# Altium PCB lilred_management_board.PcbDoc
Units mm, origin at the board's own origin, x right, y up, seen from the top; angles counter-clockwise.
Board outline 113.63 x 84.5 mm, 2 copper layers (Top Layer, Bottom Layer); 139 components, 89 nets, 405 pads, 106 vias.
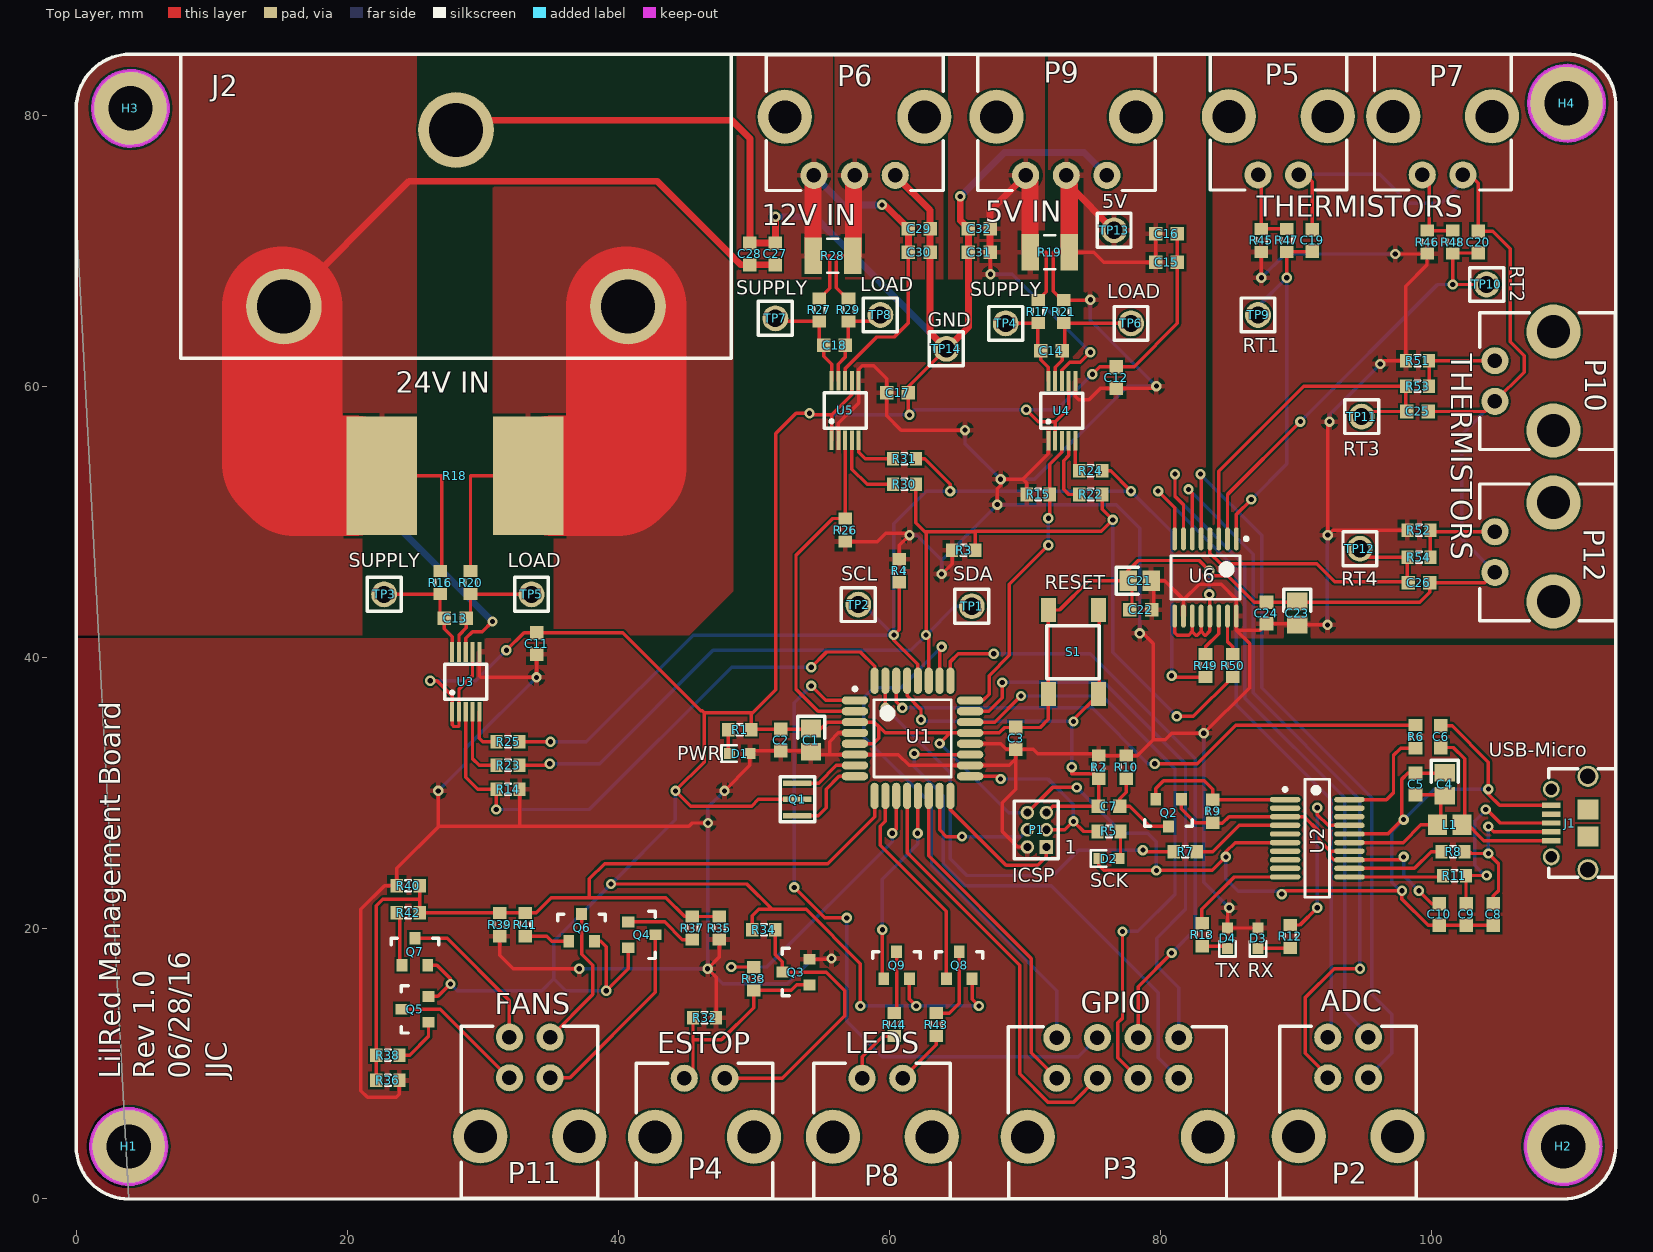
[diagram p0: Top Layer view]
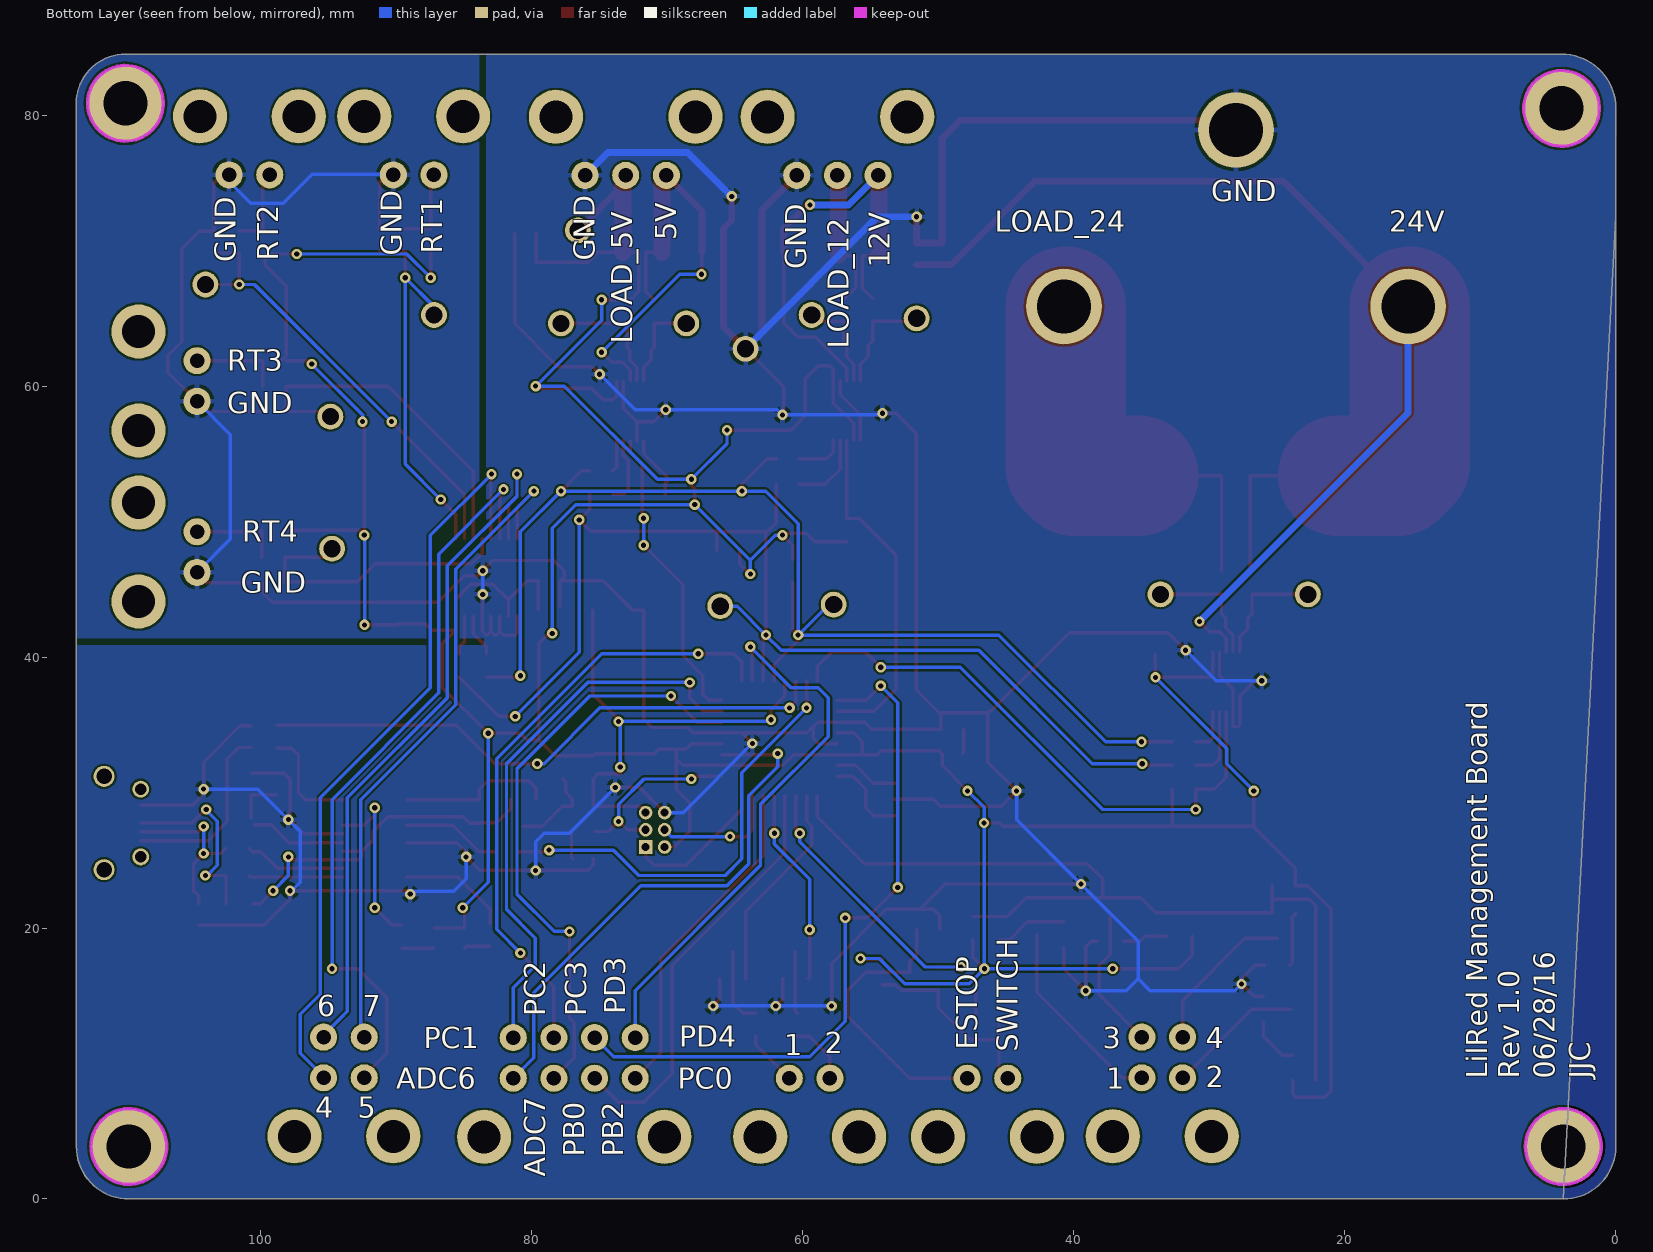
[diagram p1: Bottom Layer view, seen from below]

## Layer stack, top to bottom
Top Solder: solder mask 0.0102, Solder Resist, Dk 3.5
Top Layer: signal copper 0.0356
Dielectric1: dielectric 0.32, FR-4, Dk 4.8
Bottom Layer: signal copper 0.0356
Bottom Solder: solder mask 0.0102, Solder Resist, Dk 3.5

## Board outline
0,72.5 0,80.5 cw(c4,80.5) 4,84.5 110,84.5 cw(c110,80.875) 113.625,80.875 113.625,3.875 cw(c109.75,3.875) 109.75,0 3.875,0 cw(c3.875,3.875) 0,3.875 0,72.625 0,72.5 ccw(c3.875,3.875)

## Design rules (kind name [scope] priority, off if disabled: settings)
Clearance [All] p1: gap=0.152
HoleSize [All] p1: absolutevalues=TRUE maxlimit=5.08 minlimit=0.381 maxpercent=80.000 minpercent=20.000
MinimumAnnularRing [All] p1: minimumring=0.178
MinimumSolderMaskSliver [All] p1 off: minsoldermaskwidth=0.152
PlaneConnect [All] p1: planeconnectstyle=Relief reliefexpansion=0.508 reliefentries=4 reliefconductorwidth=0.508 reliefairgap=0.254
PolygonConnect PolygonConnect_1 [All] p1: connectstyle=Relief reliefconductorwidth=0.381 reliefentries=4 polygonreliefangle="90 Angle" airgapwidth=0.254
RoutingVias [All] p1: holewidth=0.381 width=0.762 viastyle="Through Hole" minholewidth=0.381 minwidth=0.737 maxholewidth=0.711 maxwidth=1.27
SMDNeckDown [All] p1 off: percent=90.000
SilkToBoardRegionClearance [All] p1 off:
SilkToSilkClearance [All] p1 off: silktosilkclearance=0.254
SilkToSolderMaskClearance [IsPad] p1 off: minsilkscreentomaskgap=0.254 clearancetoexposedcopper=TRUE
SolderMaskExpansion [All] p1: expansion=0.102
UnpouredPolygon [All] p1: allowunpoured=FALSE
Width [All] p1: maxlimit=10 minlimit=0.152 preferedwidth=0.254
23 further rules are at their usual default settings.

## Classes and differential pairs
component class thermal_monitor: C19 C20 C21 C22 C23 C24 C25 C26 R45 R46 R47 R48 R49 R50 R51 R52 R53 R54 TP9 TP10 TP11 TP12 U6
component class led_control: Q8 Q9 R43 R44
component class io_connectors: C27 C28 C29 C30 C31 C32 J2 P2 P3 P4 P5 P6 P7 P8 P9 P10 P11 P12 TP13 TP14
component class fan_control: Q4 Q5 Q6 Q7 R35 R36 R37 R38 R39 R40 R41 R42
component class estop_circuitry: Q3 R32 R33 R34
component class current_sense: C11 C12 C13 C14 C15 C16 C17 C18 R14 R15 R16 R17 R18 R19 R20 R21 R22 R23 R24 R25 R26 R27 R28 R29 R30 R31 TP3 TP4 TP5 TP6 TP7 TP8 U3 U4 U5
component class Arduino_mini: C1 C2 C3 C4 C5 C6 C7 C8 C9 C10 D1 D2 D3 D4 J1 L1 P1 Q1 Q2 R1 R2 R3 R4 R5 R6 R7 R8 R9 R10 R11 R12 R13 S1 TP1 TP2 U1 U2
component class lilred_management_board: H1 H2 H3 H4

## Components (designator, comment, footprint, x,y, rotation, side; value= is the part's Value field where it differs from the comment)
C1 "Bypass Tantalum, 5V, 10uF" CAPC2012N 54.226,33.875 r90 top
C2 "Bypass, 5V, 0.1uF" CAPC1608N 52,33.875 r90 top
C3 "Bypass, 5V, .1uF" CAPC1608N 69.351,34 r90 top
C4 "Bypass Tantalum, USB_PWR, 4.7uF" CAPC2012N 101,30.625 r90 top
C5 "Bypass, USB_PWR, .1uF" CAPC1608N 98.851,30.625 r90 top
C6 "Bypass, USB_PWR, 10nF" CAPC1608N 100.726,34.125 r90 top
C7 ".1uF" CAPC1608N 76.226,29 r180 top
C8 "47pF" CAPC1608N 104.601,21 r90 top
C9 "47pF" CAPC1608N 102.601,21 r90 top
C10 "Bypass, 3V3, .1uF" CAPC1608N 100.601,21 r90 top
C11 "Bypass, 5V, 0.1uF" CAPC1608N 33.976,41 r270 top
C12 "Bypass, 5V, 0.1uF" CAPC1608N 76.75,60.625 r270 top
C13 "1uF" CAPC1608N 27.976,42.875 r0 top
C14 "1uF" CAPC1608N 71.976,62.625 r0 top
C15 "Bypass, 5V, 1uF" CAPC1608N 80.476,69.125 r180 top
C16 "Bypass, 5V, 0.1uF" CAPC1608N 80.476,71.25 r180 top
C17 "Bypass, 5V, 0.1uF" CAPC1608N 60.625,59.5 r180 top
C18 "1uF" CAPC1608N 55.976,63 r0 top
C19 "510pF" CAPC1608N 91.226,70.75 r270 top
C20 "510pF" CAPC1608N 103.476,70.625 r270 top
C21 "Bypass Tanatalum, 5V, 10uF" CAPC2012N 78.5,45.625 r180 top
C22 "Bypass, 5V, 10nF" CAPC1608N 78.575,43.5 r0 top
C23 "Bypass Tantalum, 5V, 10uF" CAPC2012N 90.125,43.25 r90 top
C24 "Bypass, 5V, 10nF" CAPC1608N 87.851,43.25 r270 top
C25 "510pF" CAPC1608N 99,58.125 r180 top
C26 "510pF" CAPC1608N 99.101,45.5 r180 top
C27 "Bypass, 24V, 1uF" CAPC1608N 51.601,69.75 r270 top
C28 "Bypass, 24V, 0.1uF" CAPC1608N 49.726,69.75 r270 top
C29 "Bypass, 12V, 1uF" CAPC1608N 62.226,71.625 r180 top
C30 "Bypass, 12V, 0.1uF" CAPC1608N 62.226,69.875 r180 top
C31 "Bypass, 5V, 1uF" CAPC1608N 66.651,69.875 r0 top
C32 "Bypass, 5V, 0.1uF" CAPC1608N 66.651,71.625 r0 top
D1 "PWR_LED" "0603 - LED" 48.976,32.875 r0 top
D2 "SCK_LED" "0603 - LED" 76.226,25.125 r0 top
D3 "GRN_RX LED" "0603 - LED" 87.226,19.25 r90 top
D4 "RED_TX LED" "0603 - LED" 84.976,19.25 r90 top
H1 "Standoff" "4-40 Panhead Standoff" 3.875,3.875 r0 top
H2 "Standoff" "4-40 Panhead Standoff" 109.75,3.875 r0 top
H3 "Standoff" "4-40 Panhead Standoff" 4,80.5 r0 top
H4 "Standoff" "4-40 Panhead Standoff" 110,80.875 r0 top
J1 "USB-Micro" "USB-Micro Type B" 108.875,27.75 r90 top
J2 "Terminal Block" 3P_Molex_Terminal_Block 40.726,65.875 r180 top
L1 "Ferrite Bead, USB_PWR" INDC2012N 101.375,27.625 r180 top
P1 "ICSP" MHDR2X3-LOCK 71.601,25.98 r90 top
P2 "4P_Micro-Fit_Connector" 4P_Micro-Fit_Header 93.876,8.285 r0 top
P3 "8P_Micro-Fit_Connector" 8P_Micro-Fit_Header 76.875,8.25 r0 top
P4 "2P_Micro-Fit_Connector" 2P_Micro-Fit_Header 46.375,6.75 r0 top
P5 "2P_Micro-Fit_Connector" 2P_Micro-Fit_Header 88.726,77.75 r180 top
P6 "3P_Micro-Fit_Connector" 3P_Micro-Fit_Header 54.451,75.555 r180 top
P7 "2P_Micro-Fit_Connector" 2P_Micro-Fit_Header 100.851,77.75 r180 top
P8 "2P_Micro-Fit_Connector" 2P_Micro-Fit_Header 59.5,6.75 r0 top
P9 "3P_Micro-Fit_Connector" 3P_Micro-Fit_Header 70.076,75.555 r180 top
P10 "2P_Micro-Fit_Connector" 2P_Micro-Fit_Header 106.875,60.375 r90 top
P11 "4P_Micro-Fit_Connector" 4P_Micro-Fit_Header 33.475,8.285 r0 top
P12 "2P_Micro-Fit_Connector" 2P_Micro-Fit_Header 106.875,47.75 r90 top
Q1 "Resonator" Resonator 53.226,30.7 r270 top
Q2 "NTR4003NT1G" SOT-23 81.575,29.5 r180 top
Q3 "RSC002P03T316" SOT-23 54.125,15.8 r90 top
Q4 "NTR4003NT1G" SOT-23 40.75,20.45 r270 top
Q5 "NTR4003NT1G" SOT-23 26,13.05 r90 top
Q6 "NTR4003NT1G" SOT-23 36.351,19.025 r0 top
Q7 "NTR4003NT1G" SOT-23 24.05,17.25 r0 top
Q8 "NTR4003NT1G" SOT-23 64.225,16.25 r0 top
Q9 "NTR4003NT1G" SOT-23 59.6,16.25 r0 top
R1 "470" RESC1608N 48.976,34.625 r180 top
R2 "10k" RESC1608N 75.476,31.875 r90 top
R3 "2K" RESC1608N 65.5,47.875 r180 top
R4 "2K" RESC1608N 60.75,46.375 r90 top
R5 "470" RESC1608N 76.226,27.125 r180 top (schematic designator R3)
R6 "1K" RESC1608N 98.851,34.125 r270 top (schematic designator R4)
R7 "1K" RESC1608N 81.851,25.625 r0 top
R8 "27" RESC1608N 101.625,25.625 r0 top
R9 "10K" RESC1608N 83.875,28.625 r270 top
R10 "10K" RESC1608N 77.5,31.875 r90 top
R11 "27" RESC1608N 101.726,23.875 r0 top
R12 "470" RESC1608N 89.601,19.375 r90 top
R13 "470" RESC1608N 83.101,19.5 r90 top
R14 "2K" RESC1608N 31.875,30.25 r180 top
R15 "2K" RESC1608N 71,52 r0 top
R16 "1" RESC1608N 26.875,45.5 r270 top
R17 "1" RESC1608N 71,65.5 r270 top
R18 "RSENSE, 24V, 1m" RES5931 33.351,53.375 r180 top
R19 "RSENSE, 5V, 1m" RESC3225N 71.851,69.875 r180 top
R20 "1" RESC1608N 29.101,45.5 r270 top
R21 "1" RESC1608N 72.875,65.5 r270 top
R22 "200" RESC1608N 74.875,52 r0 top
R23 "200" RESC1608N 31.875,32 r0 top
R24 "200" RESC1608N 74.875,53.75 r0 top
R25 "200" RESC1608N 31.875,33.75 r0 top
R26 "2K" RESC1608N 56.75,49.375 r90 top
R27 "1" RESC1608N 54.851,65.625 r270 top
R28 "RSENSE, 12V, 1m" RESC3225N 55.851,69.625 r180 top
R29 "1" RESC1608N 57,65.625 r270 top
R30 "200" RESC1608N 61.125,52.75 r0 top
R31 "200" RESC1608N 61.125,54.625 r0 top
R32 "100K" RESC1608N 46.375,13.375 r180 top
R33 "200" RESC1608N 50,16.25 r90 top
R34 "100K" RESC1608N 50.75,19.875 r0 top
R35 "100K" RESC1608N 47.476,20 r270 top
R36 "100K" RESC1608N 23,8.75 r0 top
R37 "200" RESC1608N 45.476,20 r90 top
R38 "200" RESC1608N 23,10.625 r180 top
R39 "100K" RESC1608N 31.25,20.25 r270 top
R40 "100K" RESC1608N 24.501,23.125 r180 top
R41 "200" RESC1608N 33.125,20.25 r90 top
R42 "200" RESC1608N 24.501,21.125 r0 top
R43 "470" RESC1608N 63.476,12.875 r90 top
R44 "470" RESC1608N 60.375,12.875 r270 top
R45 "Therm_Rp, 30K" RESC1608N 87.476,70.75 r270 top
R46 "Therm_Rp, 30K" RESC1608N 99.726,70.625 r270 top
R47 "3M" RESC1608N 89.351,70.75 r90 top
R48 "3M" RESC1608N 101.601,70.625 r90 top
R49 "200" RESC1608N 83.351,39.375 r90 top
R50 "200" RESC1608N 85.351,39.375 r90 top
R51 "Therm_Rp, 30K" RESC1608N 99,61.875 r180 top
R52 "Therm_Rp, 30K" RESC1608N 99.101,49.375 r180 top
R53 "3M" RESC1608N 99,60 r0 top
R54 "3M" RESC1608N 99.101,47.375 r0 top
S1 "RESET" PushBtn-Tiny 73.601,40.375 r90 top
TP1 "SDA" TestPoint 66.101,43.75 r0 top
TP2 "SCL" TestPoint 57.726,43.875 r0 top
TP3 "LOAD" TestPoint 22.726,44.625 r90 top
TP4 "SUPPLY" TestPoint 68.601,64.625 r90 top
TP5 "SUPPLY" TestPoint 33.601,44.625 r90 top
TP6 "LOAD" TestPoint 77.851,64.625 r90 top
TP7 "SUPPLY" TestPoint 51.601,65 r90 top
TP8 "LOAD" TestPoint 59.351,65.25 r90 top
TP9 "RT1" TestPoint 87.226,65.25 r90 top
TP10 "RT2" TestPoint 104.101,67.5 r90 top
TP11 "RT3" TestPoint 94.875,57.75 r90 top
TP12 "RT4" TestPoint 94.75,48 r90 top
TP13 "5V" TestPoint 76.601,71.5 r90 top
TP14 "GND" TestPoint 64.226,62.75 r90 top
U1 "ATmega328P-AU" 32A_M 61.726,34 r0 top
U2 "FT231XS-U" SSOP-20_N 91.601,26.625 r0 top
U3 "INA226" 10-VSSOP 27.75,35.975 r0 top
U4 "INA226" 10-VSSOP 71.75,55.975 r0 top
U5 "INA226" 10-VSSOP 55.75,56 r0 top
U6 "ADS7828E/2K5" TI-PW16_N 83.351,45.875 r270 top

## Footprints (in the part's own frame and the unit in brackets; to place one, negate y for a bottom-side part, rotate by r counter-clockwise, add the part's x,y. Pads: shape width x height; smd on the part's side, far side on the other; paste and mask are expansions set on the pad)
2P_Micro-Fit_Header [mm] "Molex MicroFit 2P Header - PN 43650-0203"
  round 2 hole 1.07: 1(1.5,2.16) 2(-1.5,2.16)
  round 4 hole 2.43: ""(-3.65,-2.16) ""(3.65,-2.16)
  silkscreen extent -5.06,-6.73 5.03,3.28, body extent -4.82,-6.75 4.83,3.15, height 5.62
3P_Micro-Fit_Header [mm] "Molex MicroFit 3P Header - PN 43650-0304"
  round 2 hole 1.07: 1(0,0) 2(-3,0) 3(-6,0)
  round 4 hole 2.43: ""(-8.15,-4.32) ""(2.15,-4.32)
  silkscreen extent -9.56,-8.89 3.52,1.12, body extent -9.32,-8.91 3.33,0.99, height 5.62
3P_Molex_Terminal_Block [mil] "3 Screw Terminal Block"
  round 220 hole 156: 1(0,0) 2(500,-513) 3(1000,0)
  silkscreen extent -300,-733 1300,150, body extent -300,-710 1300,140, height 890
"4-40 Panhead Standoff" [mil]
  round 220 hole 128.5: ""(0,0)
  Keep-Out Layer circle w10: c0,0 r110
4P_Micro-Fit_Header [mm] "Molex MicroFit 4P Header - PN 43045-0423"
  round 2 hole 1.07: 1(1.5,0.66) 2(-1.5,0.66) 3(1.5,3.66) 4(-1.5,3.66)
  round 4 hole 2.43: ""(-3.65,-3.66) ""(3.65,-3.66)
  silkscreen extent -5.06,-8.23 5.03,4.47, body extent -5.05,-8.23 5.1,4.01, height 8.77
8P_Micro-Fit_Header [mm] "Molex MicroFit 8P Header - PN 43045-0823"
  round 2 hole 1.07: 1(4.5,0.66) 2(1.5,0.66) 3(-1.5,0.66) 4(-4.5,0.66) 5(4.5,3.66) 6(1.5,3.66) 7(-1.5,3.66) 8(-4.5,3.66)
  round 4 hole 2.43: ""(-6.65,-3.66) ""(6.65,-3.66)
  silkscreen extent -8.08,-8.23 8.03,4.47, body extent -8.08,-8.25 8.07,3.99, height 8.77
10-VSSOP [mm]
  rect 0.3x1.45 smd: 1(0,0) 2(0.5,0) 3(1,0) 4(1.5,0) 5(2,0) 6(2,4.4) 7(1.5,4.4) 8(1,4.4) 9(0.5,4.4) 10(0,4.4)
  silkscreen extent -0.55,0.9 2.55,3.5, body extent -0.5,0.6 2.6,3.8, height 1
32A_M [mm] "Thin QFP, 32-Leads, Body 7x7mm, Pitch 0.8mm, IPC Low Density"
  oval 1.95x0.6 smd: 1(-4.25,2.8) 2(-4.25,2) 3(-4.25,1.2) 4(-4.25,0.4) 5(-4.25,-0.4) 6(-4.25,-1.2) 7(-4.25,-2) 8(-4.25,-2.8) 17(4.25,-2.8) 18(4.25,-2) 19(4.25,-1.2) 20(4.25,-0.4) 21(4.25,0.4) 22(4.25,1.2) 23(4.25,2) 24(4.25,2.8)
  oval 0.6x1.95 smd: 9(-2.8,-4.25) 10(-2,-4.25) 11(-1.2,-4.25) 12(-0.4,-4.25) 13(0.4,-4.25) 14(1.2,-4.25) 15(2,-4.25) 16(2.8,-4.25) 25(2.8,4.25) 26(2,4.25) 27(1.2,4.25) 28(0.4,4.25) 29(-0.4,4.25) 30(-1.2,4.25) 31(-2,4.25) 32(-2.8,4.25)
  silkscreen extent -4.37,-2.85 2.85,3.77, body extent -3.5,-3.5 3.5,3.5, height 1.2
"0603 - LED" [mm]
  rect 0.8x0.8 smd: 1(-0.75,0) 2(0.75,0)
  silkscreen extent -1.35,-0.61 -0.23,0.61, body extent -0.76,-0.41 0.79,0.41, height 0.8
CAPC1608N [mm] "Chip Capacitor, Body 1.6x0.8mm, IPC Medium Density"
  rect 1x1 smd: 1(-0.8,0) 2(0.8,0)
  body extent -0.87,-0.48 0.87,0.48, height 0.85
CAPC2012N [mm] "Chip Capacitor, Body 2.0x1.3mm, IPC Medium Density"
  rect 1.3x1.5 smd: 1(-0.85,0) 2(0.85,0)
  body extent -1.1,-0.72 1.1,0.72, height 1.1
INDC2012N [mm] "Chip Inductor, Body 2.0x1.2mm, IPC Medium Density"
  rect 1.4x1.5 smd: 1(-0.9,0) 2(0.9,0)
  body extent -1.1,-0.7 1.1,0.7, height 1.1
MHDR2X3-LOCK [mm] "Locking Connector; Header; 3x2 Position"
  rect 1x1 hole 0.6: 1(0,0)
  round 1 hole 0.6: 2(0,1.4) 3(1.27,0) 4(1.27,1.4) 5(2.54,0) 6(2.54,1.4)
PushBtn-Tiny [mm] "Small Push Button PTS525"
  rect 1.8x1.1 smd: 1(-3.1,1.85) 2(3.1,1.85) 3(-3.1,-1.85) 4(3.1,-1.85)
  silkscreen extent -1.97,-1.9 1.95,1.97, body extent -3.07,-2.54 3.1,2.54, height 1.5
RES5931 [mm]
  rect 5.2x8.75 smd: 1(0,0) 2(10.8,0)
  body extent -2.03,-3.87 12.95,3.87, height 1.5
RESC1608N [mm] "Chip Resistor, Body 1.6x0.8mm, IPC Medium Density"
  rect 0.9x1 smd: 1(-0.85,0) 2(0.85,0)
  silkscreen extent -0.2,-0.4 0.2,0.4, body extent -0.85,-0.48 0.85,0.48, height 0.6
RESC3225N [mm] "Chip Resistor, Body 3.2x2.5mm, IPC Medium Density"
  rect 1.3x2.7 smd: 1(-1.45,0) 2(1.45,0)
  silkscreen extent -0.4,-1.25 0.4,1.25, body extent -1.68,-1.32 1.68,1.32, height 0.71
Resonator [mm] "Ceralock Resonator"
  rect 0.4x2.1 smd: 1(0,0) 2(1.2,0) 3(2.4,0)
  silkscreen extent -0.46,-1.27 2.87,1.27, body extent -0.51,-0.82 2.92,0.8, height 1
SOT-23 [mm]
  rect 0.8x0.9 smd: 1(0,0) 2(1.9,0) 3(0.95,2)
  silkscreen extent -0.8,1.5 2.7,2, body extent -0.8,0 2.7,2, height 1
SSOP-20_N [mm] "SOP, 20-Leads, Body 8.6x3.9mm, Pitch 0.635mm, IPC Medium Density"
  oval 2.25x0.4 smd: 1(-2.375,2.857) 2(-2.375,2.222) 3(-2.375,1.587) 4(-2.375,0.953) 5(-2.375,0.318) 6(-2.375,-0.318) 7(-2.375,-0.953) 8(-2.375,-1.587) 9(-2.375,-2.222) 10(-2.375,-2.857) 11(2.375,-2.857) 12(2.375,-2.222) 13(2.375,-1.587) 14(2.375,-0.953) 15(2.375,-0.318) 16(2.375,0.318) 17(2.375,0.953) 18(2.375,1.587) 19(2.375,2.222) 20(2.375,2.857)
  silkscreen extent -2.5,-4.35 0.9,4.35, body extent -1.99,-4.37 1.99,4.37, height 1.76
TestPoint [mm]
  round 1.905 hole 1.27: 1(0,0)
TI-PW16_N [mm] "SOP, 16-Leads, Body 5x4.4mm, Pitch 0.65mm, IPC Medium Density"
  oval 1.7x0.35 smd: 1(-2.85,2.275) 2(-2.85,1.625) 3(-2.85,0.975) 4(-2.85,0.325) 5(-2.85,-0.325) 6(-2.85,-0.975) 7(-2.85,-1.625) 8(-2.85,-2.275) 9(2.85,-2.275) 10(2.85,-1.625) 11(2.85,-0.975) 12(2.85,-0.325) 13(2.85,0.325) 14(2.85,0.975) 15(2.85,1.625) 16(2.85,2.275)
  silkscreen extent -2.97,-2.55 1.6,3.13, body extent -2.25,-2.55 2.25,2.55, height 1.2
"USB-Micro Type B" [mm] "USB-Micro Type B - Amphenol 10118194-0001LF"
  rect 0.4x1.35 smd: 1(-1.3,0) 2(-0.65,0) 3(0,0) 4(0.65,0) 5(1.3,0)
  round 1.55 hole 1.15: ""(-3.445,-2.7) ""(3.445,-2.7)
  round 1.25 hole 0.85: ""(-2.5,0) ""(2.5,0)
  rect 1.5x1.55 smd: ""(-1,-2.7) ""(1,-2.7)
  silkscreen extent -4.01,-4.78 4.01,0.2, body extent -4.02,-5.38 4.02,0.2, height 2.69

## Part data
C1 C4 C21 C23: library part "Cap Pol1", "Polarized Capacitor (Radial)"
C2 C3 C5 C6 C7 C8 C9 C10: library part "Cap Semi", "Capacitor (Semiconductor SIM Model)"
C11 C12 C13 C14 C15 C16 C17 C18 C19 C20 C22 C24 C25 C26 C27 C28 C29 C30 C31 C32: library part Cap, "Capacitor"
D1 D2 D3: library part LED0, "Green LED"
D4: library part LED0, "led"
J1: "USB-Micro Type B"
J2: library part 3P_Molex_Beau_38660, "Screw Terminal Block"
L1: library part Inductor, "Inductor"
P1: library part MHDR2X3, "Header, 3-Pin, Dual row"
P2 P11: "4 Pin Microfit Connector"
P3: "8-Pin Microfit Connector"
P4 P5 P7 P8 P10 P12: "2 Pin Microfit Connector"
P6 P9: "3 Pin Microfit Connector"
Q2 Q4 Q5 Q6 Q7 Q8 Q9: "N-Channel MOSFET"
Q3: "P-Channel MOSFET"
R1 R2 R3 R4 R5 R6 R7 R8 R9 R10 R11 R12 R13 R14 R15 R16 R17 R18 R19 R20 R21 R22 R23 R24 R25 R26 R27 R28 R29 R30 R31 R32 R33 R34 R35 R36 R37 R38 R39 R40 R41 R42 R43 R44 R45 R46 R47 R48 R49 R50 R51 R52 R53 R54: library part Res1, "Resistor"
S1: library part SW-PB, "Switch"
TP1 TP2 TP3 TP4 TP5 TP6 TP7 TP8 TP9 TP10 TP11 TP12 TP13 TP14: library part Ring_Terminal, "Test Point"
U1: "8-bit AVR Microcontroller, 32KB Flash, 1KB EEPROM, 2KB SRAM, 32-pin TQFP, Industrial Grade (-40°C to 85°C)"
U2: "USB to Full-Handshake UART Interface Chip, UHCI/OHCI/EHCI Compatible, USB 2.0 Compatible, -40 to +85 degC, 20-Pin SSOP, Pb-Free, Tube"
U3 U4 U5: "Current Shunt Monitor - I2C Interface"
U6: "12-Bit 50 kSPS ADC I2C Low Power 8-Channel Multiplexer Internal 2.5 V Reference, -40 to 85 degC, 16-pin SOP (PW16), Green (RoHS & no Sb/Br)"

## Via types
v1: diameter 0.762, hole 0.381, Top Layer to Bottom Layer, 105 vias
v2: diameter 0.762, hole 0.381, Top Layer to Bottom Layer, tented top, 1 vias

## Nets (pads, with @x,y where several pads share a name; then routed paths per layer and width w, separated by ;. In a path a pad name is that pad's centre, name@x,y a point inside that pad or via, vN(x,y) a via of type N, cw(c..) or ccw(c..) an arc to the next point about the centre after c; other vN are vias at no path point)
3V3: C10.2 Q2.1 R9.2 U2.3 U2.13 U2.14 | length 26
  Top Layer w0.254: Q2.1 81.575,28.8 82.6,27.775 R9.2 83.925,27.725 84.6,27.725 85.088,28.213 U2.3 90.639,28.213 91.726,27.125 91.726,26.5 92.554,25.673 ; U2.14 92.554,25.673 ; v1(97.976,25.25) 97.764,25.038 U2.13 92.814,25.038 92.554,25.298 92.554,25.673 ; v1(99.101,22.75) 100.051,21.8 C10.2
  Bottom Layer w0.254: v1(97.976,25.25) 97.976,23.875 v1(99.101,22.75)
5V: C31.2 C32.2 P9.1 R17.1 R19.2 U4.8 | length 32.3
  Top Layer w0.254: C31.2 67.451,68.275 v1(67.476,68.25) ; R19.2 71.601,69.875 71.601,66.975 R17.1@70.976,66.35 ; U4.8 72.75,61.176 73.324,61.75 74.101,61.75 v1(74.851,62.5)
  Top Layer w0.504: C31.2 C32.2 67.451,72.93 P9.1
  Top Layer w1.27: P9.1@70.001,75.43 70.401,75.03 R19.2
  Bottom Layer w0.254: v1(67.476,68.25) 69.101,68.25 v1(74.851,62.5)
5VSENSE: C1.1 C2.1 C3.1 C11.2 C12.2 C15.2 C16.2 C17.2 C21.1 C22.2 C23.1 C24.2 D1.2 D3.2 D4.2 P1.2 P9.2 Q3.2 R2.2 R3.2 R4.2 R10.2 R14.1 R15.1 R19.1 R21.1 R26.1 R32.1 R35.2 R36.2 R39.2 R40.2 R45.2 R46.2 R51.2 R52.2 TP13.1 U1.4 U1.6 U1.18 U1.20 U3.6 U4.1 U4.6 U5.2 U5.6 U6.10 U6.16 | length 407.8
  Top Layer w0.254: R36.2@23.851,8.75 23.851,7.726 23.625,7.5 21.5,7.5 21.001,7.999 21.001,21.375 22.751,23.125 R40.2 23.651,24.401 26.738,27.488 ; v1(26.726,30.125) 26.726,27.5 45.226,27.5 45.476,27.75 v1(46.625,27.75) ; U3.6 29.75,38.625 29.875,38.5 v1(33.976,38.5) C11.2 ; R39.2 31.25,18 32.25,17 v1(37.125,17) ; 32.725,27.5 R14.1 ; R32.1 47.225,16.376 v1(46.601,17) 47.476,17.875 R35.2 ; v1(47.851,30.125) 49.726,32 D1.2 49.926,33.075 54.226,33.075 54.501,32.8 55.601,32.8 ; Q3.2 55.7,17.7 v1(55.75,17.75) ; U5.2 56.25,57.25 57.75,58.75 U5.6 57.75,61.25 58,61.5 58.875,61.5 59.825,60.55 C17.2 59.825,57.8 60.875,56.75 v1(65.601,56.75) ; R26.1 59.125,48.525 59.75,49.15 61.35,49.15 v1(61.5,49) 60.75,48.25 R4.2 ; U1.4 56.251,34.4 55.601,33.75 55.601,32.8 ; v1(63.875,46.125) 64.65,46.9 R3.2 ; U1.20 68.251,33.6 68.651,33.2 C3.1 ; v1(67.976,51.25) 67.976,52.425 68.226,52.675 v1(68.226,53.125) 69.875,53.125 ; R15.1 70.15,52.85 69.875,53.125 ; P1.2 69.496,25.98 68.351,27.125 68.351,29.25 69.351,30.25 69.351,32.5 ; U4.1 71.75,55 69.875,53.125 ; U4.6 73.75,59.25 74,59 74.75,59 75.575,59.825 79.551,59.825 v1(79.726,60) ; v1(74.851,66.375) 74.826,66.35 72.751,66.35 72.101,67 72.101,69.875 R19.1 75.101,69.875 75.851,69.125 C15.2 C16.2 ; v1(78.5,41.75) 78.5,41.603 78.698,41.802 79.501,40.999 79.501,33.9 ; C22.2@79.526,43.5 79.526,45.625 80.351,45.625 81.726,44.25 81.726,44.226 ; U6.10 81.726,44.226 ; v2(85.101,21.5) 84.976,21.375 D4.2 D3.2 ; v1(87.476,68) R45.2 ; v1(92.351,42.375) 89.926,42.375 89.851,42.45 C24.2 87.376,41.975 85.626,41.975 ; v1(92.5,57.375) 92.375,57.25 v1(92.375,49) 92.75,49.375 R52.2 ; v1(96.25,61.625) 96.5,61.875 R51.2 ; v1(97.351,69.75) 99.701,69.75 99.701,68.951 98.125,67.375 98.125,62.251 R51.2@98.501,61.875 ; 55.601,32.8 U1.6 60.676,32.8 61.476,32 U1.18 68.851,32 69.351,32.5 ; 69.351,32.5 C3.1 ; C3.1 70.651,33.2 70.976,32.875 75.326,32.875 R2.2 78.326,32.725 79.501,33.9 ; 79.501,33.9 80.376,33.9 80.851,34.375 v1(83.226,34.375) 86.601,37.75 86.601,41 85.626,41.975 ; 81.726,44.226 82.875,45.375 84.5,45.375 85.626,44.249 U6.16 85.626,41.975
  Top Layer w0.508: P9.2 73.076,75.025 73.301,74.8 TP13.1
  Top Layer w1.27: R19.1 P9.2@73.301,74.8
  Bottom Layer w0.254: v1(26.726,30.125) 28.726,32.125 28.726,33.25 v1(33.976,38.5) ; v1(37.125,17) v1@46.351,17 ; v1(47.851,30.125) 46.625,28.899 v1(46.625,27.75) 46.625,17.024 v1(46.601,17) 47.726,15.875 52.476,15.875 54.351,17.75 v1(55.75,17.75) ; v1(61.5,49) 62.024,49 63.875,47.149 ; v1(63.875,46.125) 63.875,47.149 ; v1(65.601,56.75) 65.601,55.75 v1(68.226,53.125) 70.726,53.125 77.601,60 v1(79.726,60) 74.851,64.875 v1(74.851,66.375) ; v1(78.5,41.75) 78.5,49.5 76.75,51.25 v1(67.976,51.25) 63.875,47.149 ; v1(83.226,34.375) 83.226,23.375 v2(85.101,21.5) ; v1(87.476,68) 89.226,69.75 v1(97.351,69.75) ; v1(92.351,42.375) 92.351,48.726 92.375,48.75 v1(92.375,49) ; v1(92.5,57.375) 92.5,57.875 v1(96.25,61.625)
12V: C29.2 C30.2 P6.1 R27.1 R28.2 U5.8 | length 33.1
  Top Layer w0.254: R28.2@54.376,69.775 R28.2@54.526,69.625 ; R28.2 R28.2@54.526,69.625 ; R27.1 55.601,67.225 55.601,69.625 R28.2@54.526,69.625 ; U5.8 56.75,61.301 59.074,63.625 60.39,63.625 61.426,64.661 C30.2
  Top Layer w0.504: v1(59.476,73.375) 59.676,73.375 C29.2
  Top Layer w0.508: C30.2 C29.2
  Top Layer w1.27: R28.2@54.376,69.775 P6.1@54.376,75.43
  Bottom Layer w0.504: P6.1 56.631,73.375 v1(59.476,73.375)
24V: C27.2 C28.2 J2.3 R16.1 R18.2 U3.8 | length 106.8
  Top Layer w0.254: R18.2 26.976,53.375 26.976,46.475 R16.1@26.851,46.35 ; U3.8 28.75,41.375 29.25,41.875 29.976,41.875 v1(30.726,42.625)
  Top Layer w0.504: J2.3 24.576,75.125 42.875,75.125 49.05,68.95 C28.2 C27.2
  Top Layer w8.89: J2.3@15.201,65.875 15.201,54.275 16.101,53.375 R18.2@20.476,53.375
  Bottom Layer w0.254: J2.3@15.201,65.875 J2.3@16.776,67.45
  Bottom Layer w0.504: J2.3 15.326,58.025 v1(30.726,42.625)
ADC4_EXT: P2.1 U6.5 | length 55.8
  Top Layer w0.254: v1(82.976,53.5) 83.026,53.45 U6.5
  Bottom Layer w0.254: v1(82.976,53.5) 87.5,48.976 87.5,37.726 95.625,29.601 95.625,15.101 97.101,13.625 97.101,10.75 P2.1@95.369,9.018
ADC5_EXT: P2.2 U6.6 | length 55.9
  Top Layer w0.254: v1(82.101,52.375) 82.376,52.1 U6.6 ; P2.2@92.454,9.023 90.726,10.75 90.726,14.875 92.851,17 v1(94.75,17)
  Bottom Layer w0.254: v1(82.101,52.375) 86.875,47.601 86.875,37.351 94.75,29.476 v1(94.75,17)
ADC6_EXT: P2.3 U6.7 | length 52.4
  Top Layer w0.254: v1(81.101,53.5) 81.101,51.875 81.726,51.25 U6.7
  Bottom Layer w0.254: v1(81.101,53.5) 81.101,51.875 86.25,46.726 86.25,36.976 93.625,29.601 93.625,13.851 94.125,13.351 P2.3@95.396,12.08
ADC7_EXT: P2.4 U6.8 | length 49.7
  Top Layer w0.254: v1(79.851,52.25) 81.076,51.025 U6.8
  Bottom Layer w0.254: v1(79.851,52.25) 85.625,46.476 85.625,36.476 92.625,29.476 92.625,12.309 P2.4@92.334,12.018
D+: C9.2 J1.3 R11.2 | length 14.5
  Top Layer w0.254: C9.2 102.576,21.825 R11.2 v1(104.101,23.875) ; v1(104.039,28.75) 104.101,28.75 105.101,27.75 J1.3
  Bottom Layer w0.254: v1(104.039,28.75) 104.039,28.688 103.226,27.875 103.226,24.625 103.976,23.875 v1(104.101,23.875)
D-: C8.2 J1.2 R8.2 | length 12.9
  Top Layer w0.254: R8.2@102.576,25.875 102.951,25.5 v1(104.226,25.5) 104.976,24.75 104.976,22.75 104.601,22.375 C8.2 ; v1(104.226,27.5) 104.626,27.1 J1.2
  Bottom Layer w0.254: v1@104.226,25.375 v1(104.226,25.5) v1(104.226,27.5)
E\S\T\O\P\: P4.1 Q3.3 R34.2 | length 21.1
  Top Layer w0.254: P4.1 52.101,8.91 56.726,13.535 56.726,15.375 55.351,16.75 Q3.3 52.125,17.5 51.6,18.025 R34.2
FAN1: P11.1 Q4.3 | length 14.6
  Top Layer w0.254: P11.1 36.445,8.945 42.75,15.25 Q4.3
FAN2: P11.2 Q5.3 | length 10.1
  Top Layer w0.254: Q5.3 26.875,14 31.93,8.945 P11.2
FAN3: P11.3 Q6.3 | length 10.7
  Top Layer w0.254: P11.3 38.125,15.095 38.125,17.25 37.301,18.074 Q6.3
FAN4: P11.4 Q7.3 | length 11.6
  Top Layer w0.254: Q7.3 27.375,19.25 31.975,14.65 P11.4
FAN_CTRL: R35.1 R36.1 R37.2 R38.2 R39.1 R40.1 R41.2 R42.2 U1.9 | length 67.3
  Top Layer w0.254: R36.1 22.151,21.65 22.626,22.125 25.351,22.125 ; R40.1 25.351,22.125 ; R35.1 R37.2 44.9,20.85 43.5,22.25 37.875,22.25 ; U1.9 58.926,28.2 55.476,24.75 39,24.75 37.875,23.625 37.875,22.25 ; 25.351,22.125 R42.2 33.951,21.125 35.076,22.25 37.875,22.25
GND: C1.2 C2.2 C3.2 C4.2 C5.2 C6.2 C8.1 C9.1 C10.1 C11.1 C12.1 C15.1 C16.1 C17.1 C19.1 C20.1 C21.2 C22.1 C23.2 C24.1 C25.1 C26.1 C27.1 C28.1 C29.1 C30.1 C31.1 C32.1 D2.1 J1.5 J2.2 P1.6 P5.2 P6.3 P7.2 P9.3 P10.2 P12.2 Q1.2 Q4.2 Q5.2 Q6.2 Q7.2 Q8.2 Q9.2 R1.1 R34.1 S1.1 S1.2 TP14.1 U1.3 U1.5 U1.21 U2.6 U2.16 U3.1 U3.2 U3.7 U4.2 U4.7 U5.1 U5.7 U6.9 U6.11 U6.12 U6.13 | length 551.8
  Top Layer w0.254: Q7.2 26.625,17.25 27.625,16.25 v1(27.625,15.875) 26.7,14.95 Q5.2 ; v1(26.125,38.25) 26.625,38.25 27.75,37.125 U3.1 27.75,35 27.875,34.875 28.25,34.875 U3.2 28.25,37.625 29.25,38.625 U3.7 ; v1(31.75,40.5) 33.05,41.8 C11.1 40.325,41.8 46.101,36.024 46.202,36.024 46.351,35.875 ; Q6.2 38.725,19.025 39.125,18.625 v1(39.125,15.375) 40.75,17 Q4.2 ; v1(39.476,23.25) 49.5,23.25 51.375,21.375 ; 49.875,35.875 46.351,35.875 ; R34.1 49.9,20.9 50.375,21.375 51.375,21.375 ; Q1.2 50.351,29.5 49.851,29 45.351,29 v1(44.226,30.125) 46.351,32.25 46.351,35.875 ; U5.1 55.75,57.875 ; U5.7 57.25,59.375 55.75,57.875 ; U1.5 58.826,33.6 59.226,34 59.226,34.875 ; v1(57.875,14.25) 57.875,17.375 53.875,21.375 51.375,21.375 ; Q9.2 61.5,14.75 v1(62,14.25) ; v1(61.5,57.875) 61.425,57.95 C17.1 61.425,59.949 TP14.1 ; v1(63.726,33.625) 64.501,34.4 ; Q8.2 66.125,14.75 v1(66.625,14.25) ; v1(70.125,58.25) 71,57.375 72.25,57.375 ; P1.6 72.056,30.375 v1(73.851,30.375) ; U4.2 72.25,57.375 ; U4.7 73.25,58.375 72.25,57.375 ; v1(75,60.875) 75.55,61.425 C12.1 78.076,61.425 81.276,64.625 C15.1 C16.1 ; D2.1 75.476,24.625 75.851,24.25 v1(79.726,24.25) 83.851,24.25 v1(84.851,25.25) 84.851,25.625 85.534,26.308 U2.6 ; C22.1@77.926,43.75 C21.2@77.926,45.625 ; U6.9 81.076,41.799 81.25,41.625 82.101,41.625 82.376,41.9 ; U6.11 82.376,41.9 ; U6.12 83.026,41.901 ; v1(83.625,44.625) 83.676,44.574 U6.13 83.676,41.926 83.375,41.625 83.302,41.625 83.026,41.901 ; v1(88.976,22.5) 89.226,22.75 v1(97.851,22.75) 97.851,22.125 99.776,20.2 C10.1 C9.1 C8.1 ; P5.2@90.476,75.84 91.226,75.09 C19.1 ; U2.16 96.794,26.943 97.851,28 v1(97.976,28) 97.851,28.125 97.851,31 98.276,31.425 C5.2 C4.2@100.726,31.425 ; C25.1 103.965,58.125 P10.2 106.875,61.035 106.875,62.25 105.851,63.274 105.851,70.125 104.551,71.425 C20.1 103.476,74.965 P7.2@102.851,75.59 ; C6.2 101.551,34.925 104.226,32.25 v1(104.226,30.25) 104.226,29.875 105.051,29.05 J1.5 ; P12.2 103.965,45.5 C26.1 99.901,44.776 99.175,44.05 C24.1 86.95,44.05 85,46 84,46 v1(83.625,46.375) 82.875,47.125 78.375,47.125 77.625,46.375 77.625,45.926 C21.2@77.926,45.625 ; 55.75,57.875 54.25,57.875 v1(54.125,58) 53.125,58 51.625,56.5 51.625,37.574 49.826,35.775 R1.1 49.876,34.675 54.901,34.675 55.426,35.2 U1.3 58.901,35.2 59.226,34.875 ; 59.226,34.875 59.701,34.4 64.501,34.4 ; 64.501,34.4 U1.21 68.126,34.4 68.526,34.8 C3.2 71.151,34.8 71.751,35.4 S1.1 S1.2 72.576,43.475 74.726,45.625 C21.2@77.926,45.625 ; 82.376,41.9 82.376,41.874 82.625,41.625 82.75,41.625 83.026,41.901
  Top Layer w0.508: J2.2 28.746,79.625 48.375,79.625 49.726,78.274 C28.1 C27.1 v1(51.601,72.5) ; P6.3 63.026,72.98 C29.1 C30.1 63.026,63.95 TP14.1 65.851,64.375 C31.1 C32.1 65.25,72.226 v1(65.25,74)
  Bottom Layer w0.254: v1(26.125,38.25) 29.5,38.25 v1(31.75,40.5) ; v1(27.625,15.875) 28.125,15.375 34.375,15.375 35.25,16.25 ; v1(39.125,15.375) 36.125,15.375 35.25,16.25 ; v1(44.226,30.125) 44.226,28 v1(39.476,23.25) 35.25,19.024 35.25,16.25 ; v1(54.125,58) 54.25,57.875 v1(61.5,57.875) 61.875,58.25 v1(70.125,58.25) 72.375,58.25 v1(75,60.875) ; v1(57.875,14.25) v1(62,14.25) v1(66.625,14.25) ; v1(63.726,33.625) 68.831,28.52 P1.6 ; v1(73.851,30.375) 77.226,27 79.101,27 79.726,26.375 v1(79.726,24.25) ; v1(83.625,44.625) v1(83.625,46.375) ; v1(84.851,25.25) 84.851,23.625 85.776,22.7 88.776,22.7 v1(88.976,22.5) ; P5.2@90.476,75.84 90.691,75.625 96.226,75.625 98.351,73.5 100.761,73.5 P7.2@102.851,75.59 ; v1@97.776,22.7 97.101,23.375 97.101,27.125 v1(97.976,28) 100.226,30.25 v1(104.226,30.25) ; P12.2 102.25,48.715 102.25,56.41 P10.2
  Bottom Layer w0.508: v1(51.601,72.5) 54.476,72.5 TP14.1 ; P6.3@60.451,75.15 P6.3 ; v1(65.25,74) 68.5,77.25 74.381,77.25 P9.3
LED1: P8.1 R43.1 | length 4.1
  Top Layer w0.254: P8.1 63.476,11.386 R43.1
LED2: P8.2 R44.2 | length 4.9
  Top Layer w0.254: P8.2 58,10.5 59.525,12.025 R44.2@60.726,12.025
LOAD_12: P6.2 R28.1 R29.1 | length 10.7
  Top Layer w0.254: R29.1@56.976,66.475 56.876,66.475 56.101,67.25 56.101,69.625 R28.1 ; R28.1@57.376,69.675 R28.1@57.426,69.625 ; P6.2@57.376,75.43 P6.2@57.426,75.38
  Top Layer w1.27: R28.1@57.376,69.675 P6.2@57.376,75.43
LOAD_24: J2.1 R18.1 R20.1 | length 28.8
  Top Layer w0.254: R20.1 29.101,53.375 29.226,53.375 R18.1
  Top Layer w8.89: R18.1@35.226,53.375 39.976,53.375 40.601,54 J2.1@40.601,65.875
MISO: P1.1 U1.16 | length 10.8
  Top Layer w0.254: U1.16 64.526,28.724 68.625,24.625 70.976,24.625 71.601,25.25 P1.1
MOSI: P1.4 U1.15 | length 9.4
  Top Layer w0.254: U1.15 63.726,27.25 64.226,26.75 v1(65.375,26.75)
  Bottom Layer w0.254: v1(65.375,26.75) 69.701,26.75 P1.4
NetC6_1: C6.1 J1.1 L1.1 | length 13.7
  Top Layer w0.254: C6.1 101.651,33.325 102.476,32.5 102.476,27.875 103.901,26.45 J1.1
NetC7_1: C7.1 Q2.3 R10.1 | length 6.5
  Top Layer w0.254: R10.1@77.726,31.025 77.5,30.799 77.5,30.024 77.026,29.55 C7.1 77.75,29 79.25,27.5 Q2.3
NetC13_1: C13.1 R16.2 TP3.1 U3.10 | length 8.8
  Top Layer w0.254: TP3.1 22.751,44.65 26.851,44.65 26.851,43.2 C13.1 27.176,42.074 27.75,41.5 U3.10
NetC13_2: C13.2 R20.2 TP5.1 U3.9 | length 9.1
  Top Layer w0.254: U3.9 28.25,41.625 28.776,42.151 C13.2 29.101,43.2 R20.2 33.576,44.65 TP5.1
NetC14_1: C14.1 R17.2 TP4.1 U4.10 | length 7
  Top Layer w0.254: TP4.1 68.626,64.65 70.976,64.65 70.976,62.825 C14.1 71.176,61.949 71.75,61.375 U4.10
NetC14_2: C14.2 R21.2 TP6.1 U4.9 | length 9.5
  Top Layer w0.254: U4.9 72.25,61.375 72.776,61.901 C14.2 72.976,62.825 72.976,64.65 77.826,64.65 TP6.1
NetC18_1: C18.1 R27.2 TP7.1 U5.10 | length 8.1
  Top Layer w0.254: TP7.1 51.826,64.775 R27.2 54.851,63.325 C18.1 55.176,62.199 55.75,61.625 U5.10
NetC18_2: C18.2 R29.2 TP8.1 U5.9 | length 7.2
  Top Layer w0.254: U5.9 56.25,61.625 56.776,62.151 C18.2 56.976,63.2 56.976,64.775 58.876,64.775 TP8.1
NetD1_1: D1.1 R1.2 | length 1.8
  Top Layer w0.254: R1.2 48.126,32.975 D1.1
NetD2_2: D2.2 R5.1 | length 2
  Top Layer w0.254: D2.2 77.076,25.225 R5.1
NetD3_1: D3.1 R12.1 | length 2.4
  Top Layer w0.254: D3.1 89.576,18.5 R12.1
NetD4_1: D4.1 R13.1 | length 1.9
  Top Layer w0.254: R13.1 84.826,18.65 D4.1
NetP3_1: P3.1 U1.19 | length 39.9
  Top Layer w0.254: v1(61.851,32.875) 61.926,32.8 U1.19
  Bottom Layer w0.254: v1(61.851,32.875) 61.851,31.899 64,29.75 64,24.726 65.601,23.125 71.976,23.125 79.875,15.226 79.875,10.41 P3.1
NetP3_2: P3.2 U1.22 | length 44
  Top Layer w0.254: U1.22 67.801,35.2 v1(69.726,37.125) ; v1(77.226,19.75) 77.226,13.351 76.875,13 76.875,10.41 P3.2
  Bottom Layer w0.254: v1(69.726,37.125) 75.726,37.125 81.101,31.75 81.101,22.5 78.351,19.75 v1(77.226,19.75)
NetP3_3: P3.3 U1.12 | length 31.3
  Top Layer w0.254: U1.12 61.326,25.549 69.625,17.25 69.625,9.25 71.75,7.125 73.59,7.125 P3.3
NetP3_4: P3.4 U1.14 | length 24.8
  Top Layer w0.254: U1.14 62.926,25.324 70.5,17.75 70.5,10.785 P3.4
NetP3_5: P3.5 U1.23 | length 41.7
  Top Layer w0.254: U1.23 67.351,36 68.351,37 v1(68.351,38.125)
  Bottom Layer w0.254: v1(68.351,38.125) 75.875,38.125 81.875,32.125 81.875,21.375 79.75,19.25 79.75,17.226 81.375,15.601 P3.5
NetP3_6: P3.6 U1.25 | length 45.3
  Top Layer w0.254: U1.25 64.526,39.675 65.101,40.25 v1(67.726,40.25) ; P3.6 78.375,15.68 v1(80.851,18.156)
  Bottom Layer w0.254: v1(67.726,40.25) 74.851,40.25 82.601,32.5 82.601,19.906 v1(80.851,18.156)
NetP3_7: P3.7 U1.1 | length 51.7
  Top Layer w0.254: v1(53,23) 55.25,20.75 v1(56.875,20.75) ; v1(54.25,37.875) 55.325,36.8 U1.1
  Bottom Layer w0.254: v1(53,23) 53,36.625 v1(54.25,37.875) ; v1(56.875,20.75) 56.875,13.125 59.5,10.5 73.965,10.5 P3.7
NetP3_8: P3.8 U1.26 | length 40.9
  Top Layer w0.254: U1.26 63.726,40.601 v1(63.875,40.75)
  Bottom Layer w0.254: v1(63.875,40.75) 60.875,37.75 58.875,37.75 58.125,37 58.125,34.125 63.125,29.125 63.125,24.625 72.375,15.375 P3.8
NetQ1_1: Q1.1 U1.7 | length 4.8
  Top Layer w0.254: Q1.1 54.801,30.7 56.101,32 U1.7
NetQ1_3: Q1.3 U1.8 | length 6.3
  Top Layer w0.254: Q1.3 54.776,28.3 55.351,28.875 55.351,30.25 56.301,31.2 U1.8
NetQ2_3: Q2.2 R9.1 U2.1 | length 11.6
  Top Layer w0.254: Q2.2 79.675,30.3 80.25,30.875 83.25,30.875 83.875,30.25 R9.1@83.875,29.483 ; R9.1 R9.1@83.875,29.483 ; U2.1 R9.1@83.875,29.483
NetQ4_2: Q4.1 R37.1 | length 5.3
  Top Layer w0.254: Q4.1 43.425,20.45 44.725,19.15 R37.1
NetQ5_2: Q5.1 R38.1 | length 3.8
  Top Layer w0.254: R38.1 24.625,10.625 26,12 Q5.1
NetQ6_2: Q6.1 R41.1 | length 3.4
  Top Layer w0.254: R41.1 34.725,19.4 35.1,19.025 Q6.1
NetQ7_2: Q7.1 R42.1 | length 4
  Top Layer w0.254: R42.1@23.601,21.075 23.875,20.801 23.875,17.425 Q7.1
NetQ8_1: Q8.3 R43.2 | length 5.8
  Top Layer w0.254: R43.2 64.451,13.725 65.176,14.449 Q8.3
NetQ8_2: Q8.1 U1.10 | length 15.7
  Top Layer w0.254: U1.10 59.726,27.875 59.351,27.5 59.351,26.125 64.225,21.251 Q8.1
NetQ9_1: Q9.3 R44.1 | length 4.6
  Top Layer w0.254: R44.1 60.55,13.9 Q9.3
NetQ9_2: Q9.1 U1.13 | length 14.6
  Top Layer w0.254: v1(59.5,19.875) 59.5,16.35 Q9.1 ; v1(62.101,27) 62.101,29.725 U1.13
  Bottom Layer w0.254: v1(59.5,19.875) 59.5,23.601 62.101,26.202 v1(62.101,27)
NetR6_2: R6.2 U2.20 | length 8.1
  Top Layer w0.254: U2.20 96.709,29.483 97.226,30 97.226,32.75 97.751,33.275 R6.2
NetR7_2: R7.2 U2.4 | length 7.3
  Top Layer w0.254: R7.2 83.875,25.625 85.828,27.578 U2.4
NetR8_1: R8.1 U2.12 | length 7.5
  Top Layer w0.254: U2.12 98.778,24.403 100,25.625 100.626,25.625 R8.1@100.876,25.875
NetR11_1: R11.1 U2.11 | length 6.9
  Top Layer w0.254: U2.11 100.769,23.768 R11.1
NetR12_2: R12.2 U2.17 | length 13.1
  Top Layer w0.254: R12.2 90.326,20.225 v1(91.601,21.5) ; v1(91.601,28.875) 91.601,28.375 92.399,27.578 U2.17
  Bottom Layer w0.254: v1(91.601,21.5) v1(91.601,28.875)
NetR13_2: R13.2 U2.10 | length 8.2
  Top Layer w0.254: R13.2 83.076,20.375 83.076,21.375 85.469,23.768 U2.10
NetR14_2: R14.2 U1.32 U3.3 | length 43.2
  Top Layer w0.254: U3.3 28.75,31.125 29.625,30.25 R14.2 31,30.225 v1(31,28.75) ; v1(54.25,39.25) 55.375,40.375 57.875,40.375 58.926,39.324 U1.32
  Bottom Layer w0.254: v1(31,28.75) 37.875,28.75 48.375,39.25 v1(54.25,39.25)
NetR15_2: R15.2 U1.24 U4.3 | length 22.5
  Top Layer w0.254: U1.24 66.925,36.8 67.375,37.25 67.375,38.625 68.875,40.125 68.875,45.375 v1(71.75,48.25) ; v1(71.75,50.25) 71.85,50.35 R15.2 71.85,54.225 72.75,55.125 U4.3
  Bottom Layer w0.254: v1(71.75,48.25) v1(71.75,50.25)
NetR22_1: R22.1 U4.4 | length 5.1
  Top Layer w0.254: U4.4 73.25,54.875 72.875,54.5 72.875,52.375 73.25,52 R22.1
NetR23_1: R23.1 U3.4 | length 5.5
  Top Layer w0.254: U3.4 29.25,32.5 29.75,32 R23.1
NetR24_1: R24.1 U4.5 | length 2.3
  Top Layer w0.254: U4.5 73.75,54.025 R24.1
NetR25_1: R25.1 U3.5 | length 3.4
  Top Layer w0.254: U3.5 29.75,34 30,33.75 R25.1
NetR26_2: R26.2 U1.2 U5.3 | length 25.4
  Top Layer w0.254: U5.3 R26.2 55.85,50.225 53.125,47.5 53.125,37.625 54.75,36 U1.2
NetR30_1: R30.1 U5.4 | length 5.6
  Top Layer w0.254: U5.4 57.25,53.875 58.375,52.75 R30.1
NetR31_1: R31.1 U5.5 | length 3.6
  Top Layer w0.254: U5.5 57.75,55.125 58.25,54.625 R31.1
NetR33_2: R33.2 U1.11 | length 21
  Top Layer w0.254: v1(48.351,17.125) R33.2@50.101,17.125 ; v1(60.226,27) 60.526,27.3 U1.11
  Bottom Layer w0.254: v1(48.351,17.125) 50.976,17.125 60.226,26.375 v1(60.226,27)
NetR49_2: R49.2 U6.14 | length 3.2
  Top Layer w0.254: R49.2 83.351,40.75 84.326,41.725 U6.14
NetR50_2: R50.2 U6.15 | length 3
  Top Layer w0.254: U6.15 84.976,41.125 85.351,40.75 R50.2
RESET: C7.2 P1.5 R2.1 S1.3 S1.4 U1.29 | length 35.7
  Top Layer w0.254: U1.29 61.326,37.15 62.351,36.125 v1(62.351,35.375) ; P1.5 72.081,29 C7.2 75.476,29.05 R2.1 75.126,31.375 73.476,31.375 v1(73.476,31.875) ; v1(73.601,35.25) 73.601,35.375 75.501,37.275 S1.4@75.501,43.475
  Bottom Layer w0.254: v1(62.351,35.375) 62.476,35.25 v1@73.476,35.25 ; v1(73.476,31.875) v1@73.476,35.25 ; v1(73.601,35.25) v1@73.476,35.25
RT1: P5.1 R45.1 R47.2 | length 6.1
  Top Layer w0.254: P5.1@87.476,75.84 R45.1 R47.2
RT2: P7.1 R46.1 R48.2 | length 6
  Top Layer w0.254: P7.1@99.851,75.59 99.851,71.6 R46.1 R48.2
RT3: P10.1 R51.1 R53.2 | length 6.8
  Top Layer w0.254: R53.2 99.85,60.351 99.875,60.326 99.875,61.875 P10.1
RT4: P12.1 R52.1 R54.2 | length 6.8
  Top Layer w0.254: R54.2 R52.1 100.076,49.25 P12.1
RX: R6.1 U1.30 | length 43
  Top Layer w0.254: U1.30 60.526,36.7 v1(60.976,36.25) ; v1(79.601,32.125) 82.726,32.125 85.576,34.975 R6.1
  Bottom Layer w0.254: v1(60.976,36.25) 74.976,36.25 79.101,32.125 v1(79.601,32.125)
SCK: P1.3 R5.2 U1.17 | length 14.2
  Top Layer w0.254: U1.17 68.226,31.2 v1(68.226,31) ; P1.3 72.976,27.25 v1(73.601,27.875) 74.351,27.125 R5.2
  Bottom Layer w0.254: v1(68.226,31) 71.726,31 73.601,29.125 v1(73.601,27.875)
SCL: R4.1 R24.2 R25.2 R31.2 R49.1 TP2.1 U1.28 | length 93.3
  Top Layer w0.254: R25.2 v1(35,33.75) ; R4.1 60.75,42.024 v1(60.351,41.625) 60.351,41.25 62.126,39.475 U1.28 ; R31.2 62.625,54.625 64.5,52.75 v1(64.5,52.25) ; R24.2 76.351,53.75 v1(77.851,52.25) ; v1(80.851,38.625) 80.951,38.525 R49.1
  Bottom Layer w0.254: v1(35,33.75) 37.651,33.75 45.526,41.625 v1(60.351,41.625) ; TP2.1 58.101,43.875 v1(60.351,41.625) ; v1(80.851,38.625) 80.851,49.25 v1(77.851,52.25) 62.75,52.25 60.351,49.851 v1(60.351,41.625)
SDA: R3.1 R22.2 R23.2 R30.2 R50.1 TP1.1 U1.27 | length 92.8
  Top Layer w0.254: R23.2 34.826,32 v1(34.951,32.125) ; R30.2 61.975,49.9 62.75,49.125 62.75,41.649 v1(62.726,41.625) 62.926,41.425 U1.27 ; 62.625,49.25 66.35,49.25 ; R3.1 66.35,49.275 75.65,49.275 v1(76.5,50.125) 75.725,50.9 R22.2 ; v1@81.226,35.55 v1(81.226,35.625) 82.451,35.625 R50.1
  Bottom Layer w0.254: v1(34.951,32.125) 38.625,32.125 47,40.5 61.601,40.5 v1(62.726,41.625) 64.851,43.75 TP1.1 ; v1(76.5,50.125) 76.5,40.351 v1(81.226,35.625)
SWITCH: P4.2 Q3.1 R32.2 R33.1 | length 15.8
  Top Layer w0.254: P4.2 45.525,9.56 45.525,11.75 ; R32.2 45.525,11.75 ; Q3.1 53.175,15.8 52.775,15.4 R33.1 50,14.125 47.625,11.75 45.525,11.75
TEMP1: C19.2 R47.1 TP9.1 U6.1 | length 28.2
  Top Layer w0.254: U6.1 85.626,50.525 v1(86.726,51.625) ; v1(89.351,68) R47.1 91.176,69.9 C19.2
  Bottom Layer w0.254: v1(86.726,51.625) 89.351,54.25 v1(89.351,68) 87.226,65.875 TP9.1
TEMP2: C20.2 R48.1 TP10.1 U6.2 | length 33
  Top Layer w0.254: U6.2 84.976,52 v1(90.351,57.375) ; C20.2 101.651,69.825 R48.1 v1(101.601,67.5) TP10.1
  Bottom Layer w0.254: v1(90.351,57.375) 100.476,67.5 v1(101.601,67.5)
TEMP3: C25.2 R53.1 TP11.1 U6.3 | length 27
  Top Layer w0.254: U6.3 84.326,53.725 90.601,60 R53.1 98.15,59.649 98.125,59.624 98.125,58.551 C25.2@98.551,58.125 ; TP11.1 95.25,58.125 C25.2
TEMP4: C26.2 R54.1 TP12.1 U6.4 | length 22.1
  Top Layer w0.254: U6.4 83.676,47.675 84.476,46.875 91.551,46.875 92.876,45.55 98.251,45.55 R54.1 95.375,47.375 TP12.1
TX: R7.1 U1.31 | length 33
  Top Layer w0.254: v1(59.726,36.25) U1.31 ; v1(78.726,25.75) 78.851,25.625 R7.1
  Bottom Layer w0.254: v1(59.726,36.25) 64.5,31.476 64.5,25.101 65.726,23.875 72.101,23.875 73.976,25.75 v1(78.726,25.75)
USBVCC: C4.1 C5.1 L1.2 U2.15 | length 10.7
  Top Layer w0.254: U2.15@94.044,26.375 U2.15 97.933,26.308 99.25,27.625 L1.2 ; C5.1 100.726,29.825 L1.2@100.726,28.125
pads on no net: H1. H2. H3. H4. J1. J1.4 P2. P3. P4. P5. P6. P7. P8. P9. P10. P11. P12. U2.2 U2.5 U2.7 U2.8 U2.9 U2.18 U2.19

## Polygon pours and split planes (outlines as drawn)
GND on Bottom Layer "Bottom Layer-No Net" (solid, remove dead copper, pour order 3): 0,76.491 -0.006,80.5 cw(c3.994,80.5) 3.994,84.5 110,84.5 cw(c110,80.875) 113.625,80.875 113.625,3.875 cw(c109.75,3.875) 109.75,0 3.875,0 cw(c3.875,3.875) 0,3.875
5VSENSE on Top Layer "Top Layer-5VSENSE" (solid, remove dead copper, pour order 19): 74.375,67.875 72.75,67.875 72.75,71.5 71.75,71.5 71.75,84.5 74.375,84.5
5V on Top Layer "Top Layer-5V" (solid, remove dead copper, pour order 17): 71.5,84.5 71.5,71.5 71,71.5 71,67.875 64.375,67.875 64.375,84.5
LOAD_12 on Top Layer "Top Layer-LOAD_12" (solid, remove dead copper, pour order 15): 56,84.5 56,71.125 56.75,71.125 56.75,67.875 64,67.875 64,84.5
12V on Top Layer "Top Layer-12V" (solid, remove dead copper, pour order 13): 55.125,84.5 55.875,84.5 55.875,71.125 55,71.125 55,67.875 48.75,67.875 48.75,84.5
LOAD_24 on Top Layer "Top Layer-LOAD_24" (solid, remove dead copper, pour order 11): 30.75,84.5 48.5,84.5 48.5,44.875 45.25,41.625 41.625,41.625 35.25,41.625 35.25,48.625 35.25,48.75 30.75,48.75
24V on Top Layer "Top Layer-24V" (solid, remove dead copper, pour order 9): 25.125,49 25.125,58.125 25.125,84.5 4,84.5 ccw(c4,80.481) 0,80.877 0,80.488 0,41.625 21.125,41.625 21.125,48.75 25.125,48.75
5VSENSE on Top Layer "Top Layer-5VSENSE" (solid, remove dead copper, pour order 7): 3.875,-0.012 109.75,-0.012 ccw(c109.75,3.875) 113.637,3.875 113.637,80.875 ccw(c110.001,80.875) 110.001,84.511 109.989,84.5 74.375,84.5 74.375,63 73.125,61.75 48.75,61.75 48.75,44.863 45.262,41.375 0,41.375 0,3.875 ccw(c3.881,3.869)

## Other copper
Top Layer:
  pour cut-out: 83.5,40.875 113.625,40.875 113.625,41.375 83.5,41.375
  pour cut-out: 83.375,84.5 83.375,47.5 83.875,47.5 83.875,84.5
Bottom Layer:
  pour cut-out: 83.5,40.875 113.625,40.875 113.625,41.375 83.5,41.375
  pour cut-out: 83.375,84.5 83.375,47.5 83.875,47.5 83.875,84.5

## Silkscreen, mask and mechanical layers (free items; w line width, h text height)
Top Overlay:
  lines w0.254: 53.25,34 53.25,35.625 55.25,35.625 55.25,34 ; 78.375,44.625 76.75,44.625 76.75,46.625 78.375,46.625 ; 89.125,43.375 89.125,45 91.125,45 91.125,43.375 ; 100,30.75 100,32.375 102,32.375 102,30.75 ; 0,80.5 cw(c4,80.5) 4,84.5 110,84.5 cw(c110,80.875) 113.625,80.875 113.625,3.875 cw(c109.75,3.875) 109.75,0 4,0 ; 0,80.5 0,3.875 ccw(c3.875,3.875) 3.875,0 4,0 ; 0,80.5 0,80.5 ; 4,0 ccw(c4,0) 4,0 ; 21.476,43.375 23.976,43.375 23.976,45.875 21.476,45.875 21.476,43.375 ; 32.351,43.375 34.851,43.375 34.851,45.75 34.851,45.875 32.351,45.875 32.351,45.75 32.351,43.375 ; 50.351,63.75 50.351,66.25 52.851,66.25 52.851,63.75 50.351,63.75 ; 56.476,42.625 58.976,42.625 58.976,45.125 56.476,45.125 56.476,42.625 ; 58.101,64 60.601,64 60.601,66.5 58.101,66.5 58.101,64 ; 62.976,61.5 62.976,64 65.476,64 65.476,61.5 62.976,61.5 ; 64.851,42.5 67.351,42.5 67.351,45 64.851,45 64.851,42.5 ; 67.351,63.375 69.726,63.375 69.851,63.375 69.851,65.875 67.351,65.875 67.351,63.375 ; 69.226,25.125 72.476,25.125 72.476,29.375 69.226,29.375 69.226,25.125 ; 75.351,70.25 77.851,70.25 77.851,72.75 75.351,72.75 75.351,72.5 75.351,70.25 ; 76.601,63.375 76.601,65.875 79.101,65.875 79.101,63.375 76.601,63.375 ; 85.976,64 88.476,64 88.476,66.375 88.476,66.5 85.976,66.5 85.976,66.375 85.976,64 ; 93.5,46.75 96,46.75 96,49.25 93.5,49.25 93.5,46.75 ; 93.625,56.5 96.125,56.5 96.125,59 93.625,59 93.625,58.75 93.625,56.5 ; 102.851,66.25 105.351,66.25 105.351,68.75 102.851,68.75 102.851,66.25
  text "THERMISTORS" at 87.125,72.5 h1.52
  text "5V IN" at 67.101,72.125 h1.52
  text "12V IN" at 50.601,71.875 h1.52
  text "THERMISTORS" at 101.5,62.375 h1.52 r270
  text "24V IN" at 23.601,59.5 h1.52
  text "PWR" at 44.351,32.375 h1.02
  text "SCK" at 74.851,23 h1.02
  text "TX" at 84.101,16.375 h1.02
  text "RX" at 86.476,16.375 h1.02
  text "ADC" at 91.851,13.875 h1.52
  text "GPIO" at 74.125,13.75 h1.52
  text "FANS" at 30.875,13.625 h1.52
  text "ESTOP" at 42.875,10.75 h1.52
  text "LEDS" at 56.75,10.75 h1.52
  text "LilRed Management Board" at 3.25,8.875 h1.52 r90
  text "Rev 1.0" at 5.75,8.875 h1.52 r90
  text "06/28/16" at 8.375,8.875 h1.52 r90
  text "JJC" at 11.125,8.875 h1.52 r90
Bottom Overlay:
  text "GND" at 29.875,73.625 h1.52
  text "24V" at 16.726,71.375 h1.52
  text "LOAD_24" at 45.851,71.375 h1.52
  text "5V" at 69.351,70.75 h1.52 r270
  text "RT1" at 86.601,69.75 h1.52 r270
  text "GND" at 89.601,69.625 h1.52 r270
  text "GND" at 75.375,69.25 h1.52 r270
  text "RT2" at 98.726,69.25 h1.52 r270
  text "GND" at 101.851,69.125 h1.52 r270
  text "12V" at 53.601,68.75 h1.52 r270
  text "GND" at 59.75,68.625 h1.52 r270
  text "LOAD_5V" at 72.601,63.125 h1.52 r270
  text "LOAD_12" at 56.601,62.75 h1.52 r270
  text "RT3" at 102.5,61.125 h1.52
  text "GND" at 102.5,58 h1.52
  text "RT4" at 101.375,48.5 h1.52
  text "GND" at 101.476,44.75 h1.52
  text "PD3" at 73.125,13.625 h1.52 r270
  text "PC3" at 76,13.5 h1.52 r270
  text "PC2" at 79,13.5 h1.52 r270
  text "7" at 92.476,13.5 h1.52
  text "6" at 95.851,13.5 h1.52
  text "PD4" at 69.125,11.25 h1.52
  text "4" at 30.25,11.125 h1.52
  text "3" at 37.875,11.125 h1.52
  text "PC1" at 88,11.125 h1.52
  text "ESTOP" at 47.125,11 h1.52 r270
  text "SWITCH" at 44.125,10.875 h1.52 r270
  text "2" at 58.375,10.75 h1.52
  text "1" at 61.375,10.625 h1.52
  text "JJC" at 1.875,8.875 h1.52 r270
  text "06/28/16" at 4.5,8.875 h1.52 r270
  text "Rev 1.0" at 7.125,8.875 h1.52 r270
  text "LilRed Management Board" at 9.5,8.875 h1.52 r270
  text "2" at 30.25,8.25 h1.52
  text "1" at 37.625,8.125 h1.52
  text "PC0" at 69.25,8.125 h1.52
  text "ADC6" at 90,8.125 h1.52
  text "5" at 92.851,6 h1.52
  text "4" at 95.976,6 h1.52
  text "PB2" at 73.25,3.125 h1.52 r270
  text "PB0" at 76.125,3.125 h1.52 r270
  text "ADC7" at 79,1.625 h1.52 r270
Mechanical 16:
  drawing of 1874 lines, arcs and shapes, not listed
  text "1" at -52.789,112.903 h1.78
  text "2" at 17.078,112.903 h1.78
  text "3" at 86.801,112.903 h1.78
  text "4" at 156.677,112.903 h1.78
  text "A" at -85.208,87.046 h1.78
  text "A" at 189.112,87.046 h1.78
  text "B" at -85.208,33.071 h1.78
  text "B" at 189.112,33.071 h1.78
  text "C" at -85.208,-20.904 h1.78
  text "C" at 189.112,-20.904 h1.78
  text "ENGINEER:" at 74.177,-66.548 h1.14
  text "TITLE:" at 112.277,-66.548 h1.14
  text "PCB DESIGNER:" at 74.177,-74.041 h1.14
  text "D" at -85.208,-74.752 h1.78
  text "D" at 189.112,-74.752 h1.78
  text "DATE:" at 74.177,-81.788 h1.14
  text "PART NO.:" at 112.277,-81.788 h1.14
  text "REV:" at 165.617,-81.788 h1.14
  text "Altium Limited" at 41.157,-84.328 h1.78
  text ".PRINT_DATE" at 75.447,-84.836 h1.78
  text "12a Rodborough Rd" at 41.157,-86.868 h1.78
  text "Frenchs Forest" at 41.157,-89.408 h1.78
  text "FILE NAME:" at 74.177,-89.408 h1.14
  text "DWG NO:" at 112.277,-89.408 h1.14
  text "SCALE:" at 165.617,-89.408 h1.14
  text "NSW 2086" at 41.157,-91.948 h1.78
  text ".PCB_FILE_NAME_NO_PATH" at 75.447,-92.456 h1.78
  text "1" at -52.789,-97.917 h1.78
  text "2" at 17.078,-97.917 h1.78
  text "3" at 86.801,-97.917 h1.78
  text "4" at 156.677,-97.917 h1.78

## Text inside footprints (layer, text, board x,y; h text height)
P1: Top Overlay "1" at 72.976,25.5 h1